# EAGLE board pxbee-proto (EAGLE 9.4.2)
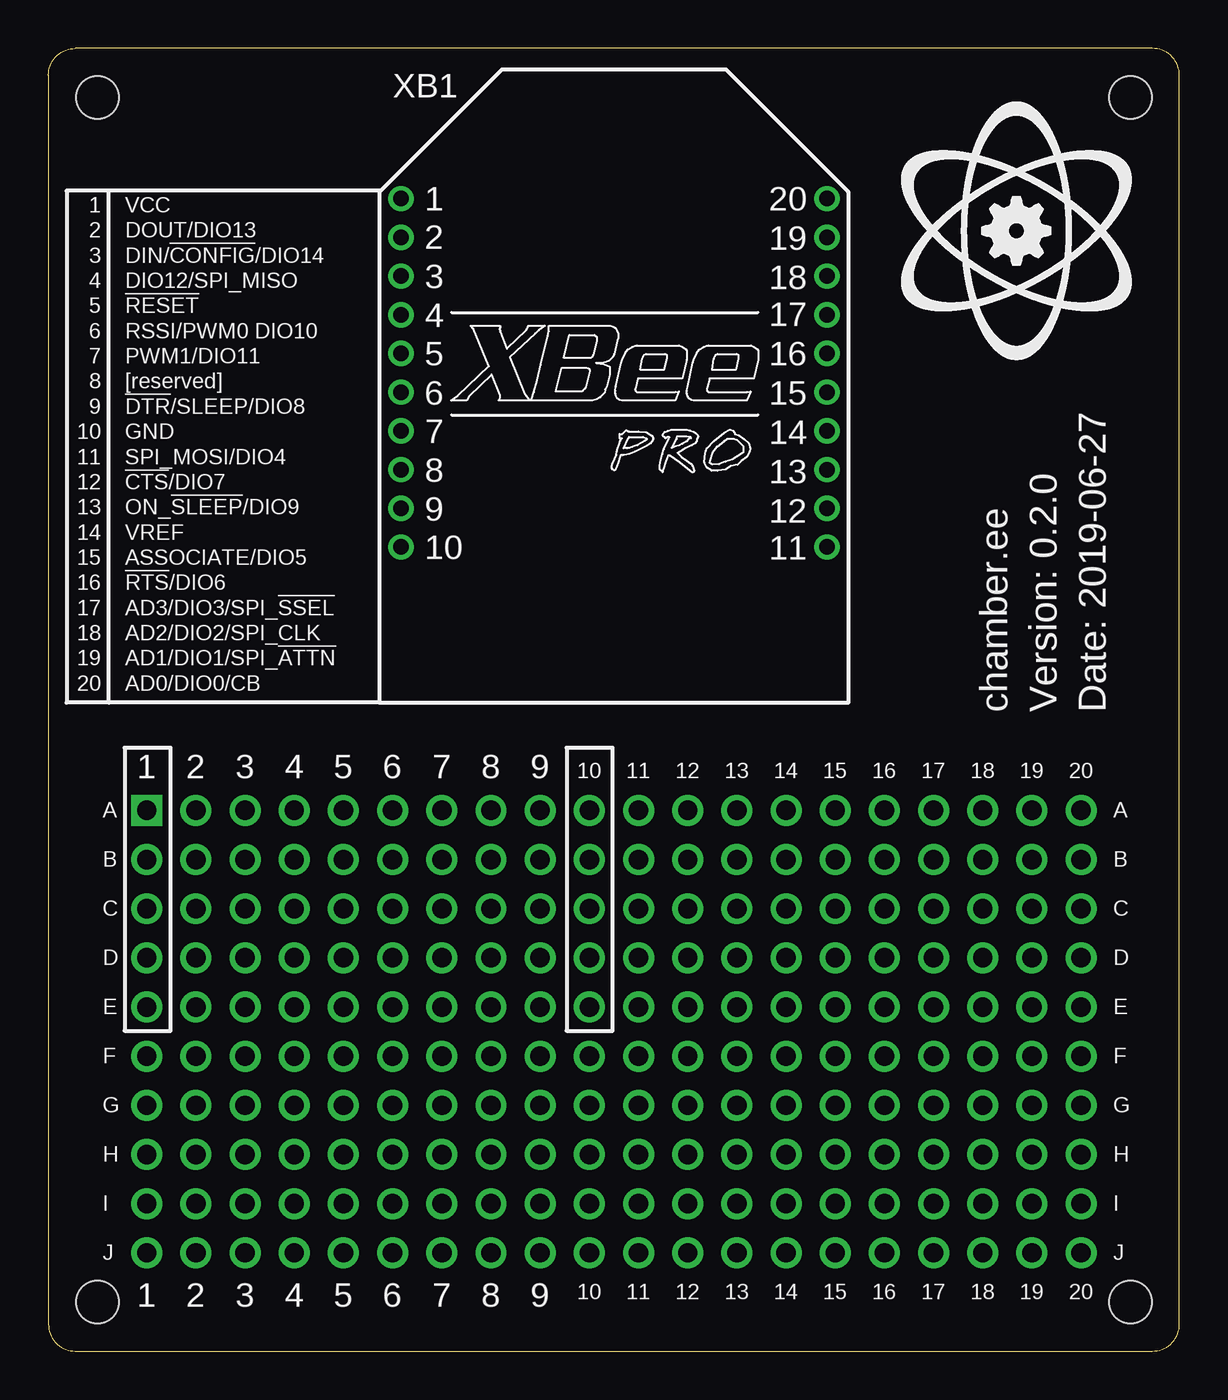
[diagram p0: board, top side]
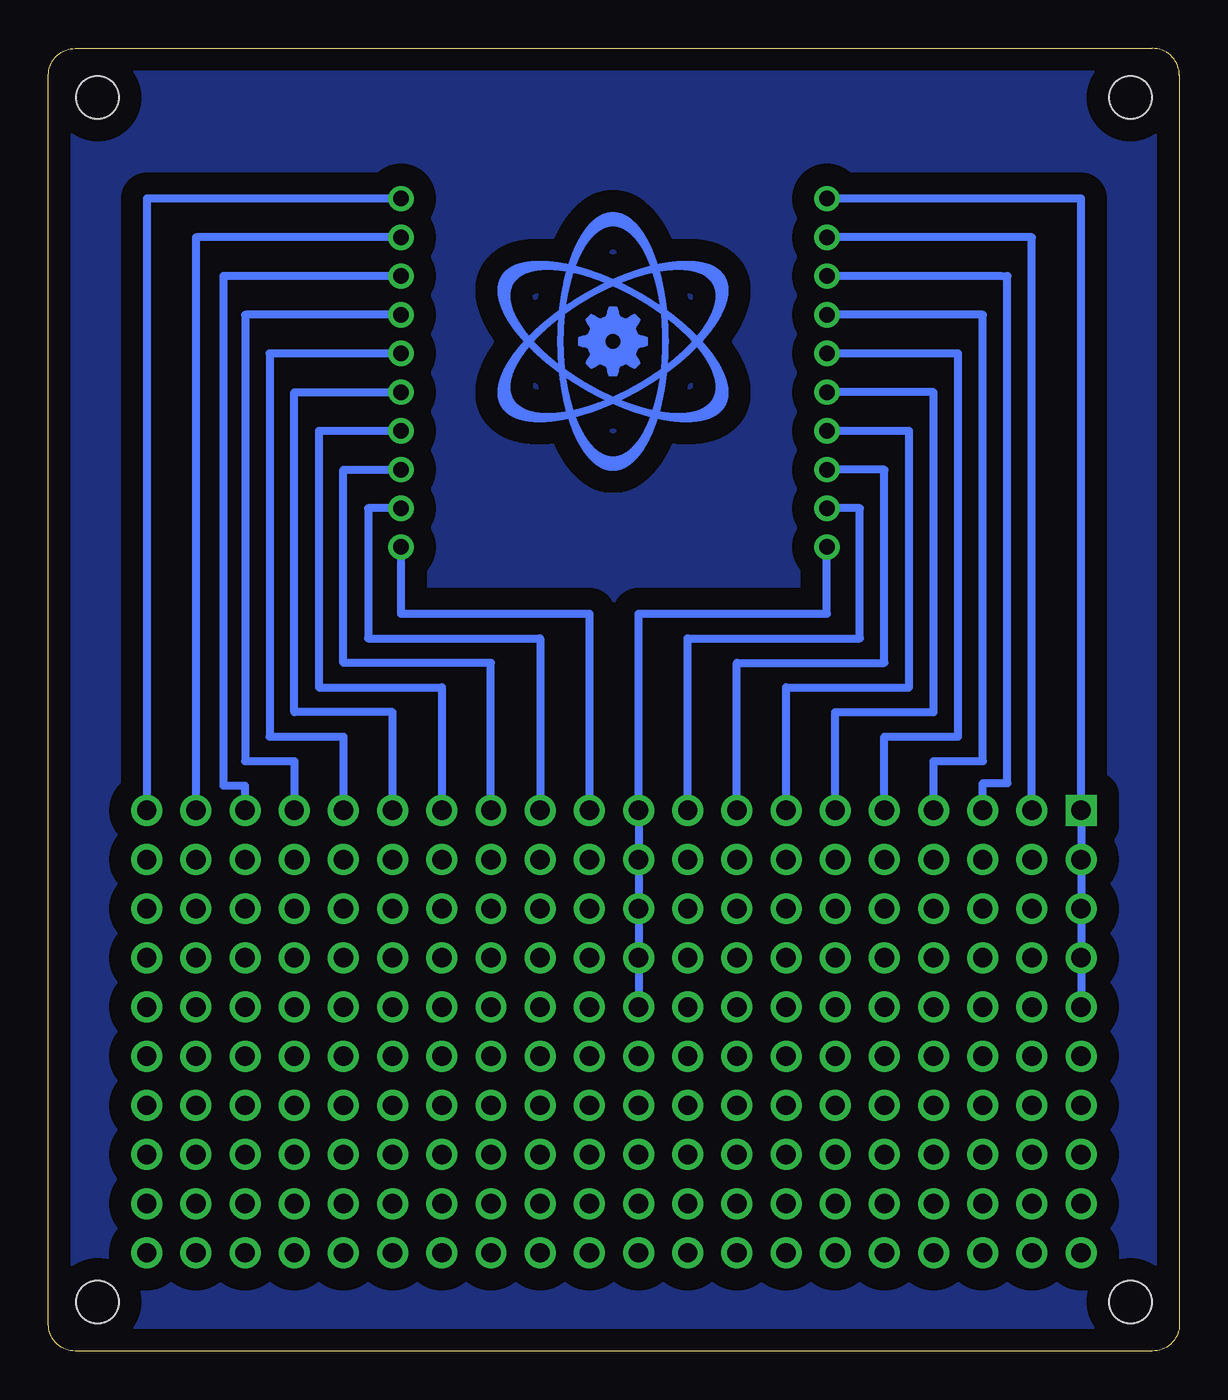
[diagram p1: board, bottom side, seen from below]

Size 58.42 x 67.31 mm. Coordinates in mm from the lower left corner, seen from the top.
Outline: 58.42,1.4 58.42,65.91 arc90 57.02,67.31 1.4,67.31 arc90 0,65.91 0,1.4 arc90 1.4,0 57.02,0 arc90 58.42,1.4
Copper layers (1*16): Top 0.035mm / dielectric 1.5mm / Bottom 0.035mm
Design rules "default": minimum track width 6mil, minimum drill 0.35mm, track to track 6mil, track to pad 6mil, pad to pad 6mil, via to via 6mil, smd to smd 6mil, copper to edge 40mil, drill to drill 6mil, minimum pad ring 10mil, minimum via ring 8mil, stop-mask expansion 4mil, vias tented up to drill 0mil, thermal gap 10mil
Net classes: 0 default: width 0.406 mm, clearance 0.406 mm
Holes 2.2 mm at 2.54,2.54 55.88,2.54 55.88,64.77 2.54,64.77

## Footprints (pad centres in the part's own frame; a part is rotated, then mirrored left to right if it is on the bottom)
XBEE_PROTO_TH_20X10 = drill 1 pad 1.6 square: P1 -24.13,0 | drill 1 pad 1.6: P1-B -24.13,-2.54; P1-C -24.13,-5.08; P1-D -24.13,-7.62; P1-E -24.13,-10.16; P1-F -24.13,-12.7; P1-G -24.13,-15.24; P1-H -24.13,-17.78; P1-I -24.13,-20.32; P1-J -24.13,-22.86; P2 -21.59,0; P2-B -21.59,-2.54; P2-C -21.59,-5.08; P2-D -21.59,-7.62; P2-E -21.59,-10.16; P2-F -21.59,-12.7; P2-G -21.59,-15.24; P2-H -21.59,-17.78; P2-I -21.59,-20.32; P2-J -21.59,-22.86; P3 -19.05,0; P3-B -19.05,-2.54; P3-C -19.05,-5.08; P3-D -19.05,-7.62; P3-E -19.05,-10.16; P3-F -19.05,-12.7; P3-G -19.05,-15.24; P3-H -19.05,-17.78; P3-I -19.05,-20.32; P3-J -19.05,-22.86; P4 -16.51,0; P4-B -16.51,-2.54; P4-C -16.51,-5.08; P4-D -16.51,-7.62; P4-E -16.51,-10.16; P4-F -16.51,-12.7; P4-G -16.51,-15.24; P4-H -16.51,-17.78; P4-I -16.51,-20.32; P4-J -16.51,-22.86; P5 -13.97,0; P5-B -13.97,-2.54; P5-C -13.97,-5.08; P5-D -13.97,-7.62; P5-E -13.97,-10.16; P5-F -13.97,-12.7; P5-G -13.97,-15.24; P5-H -13.97,-17.78; P5-I -13.97,-20.32; P5-J -13.97,-22.86; P6 -11.43,0; P6-B -11.43,-2.54; P6-C -11.43,-5.08; P6-D -11.43,-7.62; P6-E -11.43,-10.16; P6-F -11.43,-12.7; P6-G -11.43,-15.24; P6-H -11.43,-17.78; P6-I -11.43,-20.32; P6-J -11.43,-22.86; P7 -8.89,0; P7-B -8.89,-2.54; P7-C -8.89,-5.08; P7-D -8.89,-7.62; P7-E -8.89,-10.16; P7-F -8.89,-12.7; P7-G -8.89,-15.24; P7-H -8.89,-17.78; P7-I -8.89,-20.32; P7-J -8.89,-22.86; P8 -6.35,0; P8-B -6.35,-2.54; P8-C -6.35,-5.08; P8-D -6.35,-7.62; P8-E -6.35,-10.16; P8-F -6.35,-12.7; P8-G -6.35,-15.24; P8-H -6.35,-17.78; P8-I -6.35,-20.32; P8-J -6.35,-22.86; P9 -3.81,0; P9-B -3.81,-2.54; P9-C -3.81,-5.08; P9-D -3.81,-7.62; P9-E -3.81,-10.16; P9-F -3.81,-12.7; P9-G -3.81,-15.24; P9-H -3.81,-17.78; P9-I -3.81,-20.32; P9-J -3.81,-22.86; P10 -1.27,0; P10-B -1.27,-2.54; P10-C -1.27,-5.08; P10-D -1.27,-7.62; P10-E -1.27,-10.16; P10-F -1.27,-12.7; P10-G -1.27,-15.24; P10-H -1.27,-17.78; P10-I -1.27,-20.32; P10-J -1.27,-22.86; P11 1.27,0; P11-B 1.27,-2.54; P11-C 1.27,-5.08; P11-D 1.27,-7.62; P11-E 1.27,-10.16; P11-F 1.27,-12.7; P11-G 1.27,-15.24; P11-H 1.27,-17.78; P11-I 1.27,-20.32; P11-J 1.27,-22.86; P12 3.81,0; P12-B 3.81,-2.54; P12-C 3.81,-5.08; P12-D 3.81,-7.62; P12-E 3.81,-10.16; P12-F 3.81,-12.7; P12-G 3.81,-15.24; P12-H 3.81,-17.78; P12-I 3.81,-20.32; P12-J 3.81,-22.86; P13 6.35,0; P13-B 6.35,-2.54; P13-C 6.35,-5.08; P13-D 6.35,-7.62; P13-E 6.35,-10.16; P13-F 6.35,-12.7; P13-G 6.35,-15.24; P13-H 6.35,-17.78; P13-I 6.35,-20.32; P13-J 6.35,-22.86; P14 8.89,0; P14-B 8.89,-2.54; P14-C 8.89,-5.08; P14-D 8.89,-7.62; P14-E 8.89,-10.16; P14-F 8.89,-12.7; P14-G 8.89,-15.24; P14-H 8.89,-17.78; P14-I 8.89,-20.32; P14-J 8.89,-22.86; P15 11.43,0; P15-B 11.43,-2.54; P15-C 11.43,-5.08; P15-D 11.43,-7.62; P15-E 11.43,-10.16; P15-F 11.43,-12.7; P15-G 11.43,-15.24; P15-H 11.43,-17.78; P15-I 11.43,-20.32; P15-J 11.43,-22.86; P16 13.97,0; P16-B 13.97,-2.54; P16-C 13.97,-5.08; P16-D 13.97,-7.62; P16-E 13.97,-10.16; P16-F 13.97,-12.7; P16-G 13.97,-15.24; P16-H 13.97,-17.78; P16-I 13.97,-20.32; P16-J 13.97,-22.86; P17 16.51,0; P17-B 16.51,-2.54; P17-C 16.51,-5.08; P17-D 16.51,-7.62; P17-E 16.51,-10.16; P17-F 16.51,-12.7; P17-G 16.51,-15.24; P17-H 16.51,-17.78; P17-I 16.51,-20.32; P17-J 16.51,-22.86; P18 19.05,0; P18-B 19.05,-2.54; P18-C 19.05,-5.08; P18-D 19.05,-7.62; P18-E 19.05,-10.16; P18-F 19.05,-12.7; P18-G 19.05,-15.24; P18-H 19.05,-17.78; P18-I 19.05,-20.32; P18-J 19.05,-22.86; P19 21.59,0; P19-B 21.59,-2.54; P19-C 21.59,-5.08; P19-D 21.59,-7.62; P19-E 21.59,-10.16; P19-F 21.59,-12.7; P19-G 21.59,-15.24; P19-H 21.59,-17.78; P19-I 21.59,-20.32; P19-J 21.59,-22.86; P20 24.13,0; P20-B 24.13,-2.54; P20-C 24.13,-5.08; P20-D 24.13,-7.62; P20-E 24.13,-10.16; P20-F 24.13,-12.7; P20-G 24.13,-15.24; P20-H 24.13,-17.78; P20-I 24.13,-20.32; P20-J 24.13,-22.86
XBEE-PRO = drill 0.8 pad 1.27: 1 -11,8.746; 2 -11,6.746; 3 -11,4.746; 4 -11,2.746; 5 -11,0.746; 6 -11,-1.254; 7 -11,-3.254; 8 -11,-5.254; 9 -11,-7.254; 10 -11,-9.254; 11 11,-9.254; 12 11,-7.254; 13 11,-5.254; 14 11,-3.254; 15 11,-1.254; 16 11,0.746; 17 11,2.746; 18 11,4.746; 19 11,6.746; 20 11,8.746

## Placement (x,y rotation side)
U$2  XBEE_PROTO  [XBEE_PROTO_TH_20X10]  29.21,27.94 0 top
XB1  XBEE-PRO  [XBEE-PRO]  29.21,50.8 0 top

## Library data of the parts
U$2 = pxbee_proto
XB1 = xbee; MPN: XBP24-AWI-001; OC_FARNELL: 1337916; OC_NEWARK: 42M2667

## Nets
N$1: U$2.P1 U$2.P1-B U$2.P1-C U$2.P1-D U$2.P1-E XB1.1
N$2: U$2.P2 XB1.2
N$3: U$2.P3 XB1.3
N$4: U$2.P4 XB1.4
N$5: U$2.P5 XB1.5
N$6: U$2.P6 XB1.6
N$7: U$2.P7 XB1.7
N$8: U$2.P8 XB1.8
N$9: U$2.P9 XB1.9
N$10: U$2.P10 U$2.P10-B U$2.P10-C U$2.P10-D U$2.P10-E XB1.10
N$11: U$2.P11 XB1.11
N$12: U$2.P12 XB1.12
N$13: U$2.P13 XB1.13
N$14: U$2.P14 XB1.14
N$15: U$2.P15 XB1.15
N$16: U$2.P16 XB1.16
N$17: U$2.P17 XB1.17
N$18: U$2.P18 XB1.18
N$19: U$2.P19 XB1.19
N$20: U$2.P20 XB1.20

## Tracks (layer width: path | path; a pad name or v marks a point on that pad's centre or on a via)
BORDER
  pour Bottom (isolate 1.143): 0.01,1.39 0.01,65.92 arc-90 1.39,67.31 57.03,67.31 arc-90 58.42,65.91 58.42,1.4 arc-90 57.03,0.01 1.39,0.01 arc-90
N$1
  Bottom 0.406: XB1.1 5.12,59.55 5.08,59.55 U$2.P1 U$2.P1-B U$2.P1-C U$2.P1-D U$2.P1-E
N$2
  Bottom 0.406: U$2.P2 7.62,57.55 7.63,57.55 XB1.2
N$3
  Bottom 0.406: U$2.P3 10.16,29.35 8.89,29.35 8.89,55.56 9.24,55.55 XB1.3
N$4
  Bottom 0.406: U$2.P4 12.7,30.48 10.16,30.48 10.16,53.55 XB1.4
N$5
  Bottom 0.406: U$2.P5 15.24,31.75 11.43,31.75 11.43,51.55 11.45,51.55 XB1.5
N$6
  Bottom 0.406: U$2.P6 17.78,33.02 12.7,33.02 12.7,49.55 XB1.6
N$7
  Bottom 0.406: U$2.P7 20.32,34.29 13.97,34.29 13.97,47.55 XB1.7
N$8
  Bottom 0.406: U$2.P8 22.86,35.56 15.24,35.56 15.24,45.55 15.25,45.55 XB1.8
N$9
  Bottom 0.406: U$2.P9 25.4,36.83 16.51,36.83 16.51,43.55 XB1.9
N$10
  Bottom 0.406: XB1.10 18.21,38.1 27.94,38.1 U$2.P10 U$2.P10-B U$2.P10-C U$2.P10-D U$2.P10-E
N$11
  Bottom 0.406: XB1.11 40.21,38.1 30.48,38.1 U$2.P11
N$12
  Bottom 0.406: XB1.12 41.9,43.55 41.91,43.55 41.91,36.83 33.02,36.83 U$2.P12
N$13
  Bottom 0.406: U$2.P13 35.56,35.56 43.18,35.56 43.18,45.55 XB1.13
N$14
  Bottom 0.406: XB1.14 44.41,47.55 44.45,47.55 44.45,34.29 38.1,34.29 U$2.P14
N$15
  Bottom 0.406: U$2.P15 40.64,33.02 45.72,33.02 45.72,49.55 45.69,49.55 XB1.15
N$16
  Bottom 0.406: XB1.16 46.99,51.55 46.99,31.75 43.18,31.75 U$2.P16
N$17
  Bottom 0.406: XB1.17 48.23,53.55 48.26,53.55 48.26,30.48 45.72,30.48 U$2.P17
N$18
  Bottom 0.406: U$2.P18 48.26,29.21 49.39,29.21 49.39,55.55 49.37,55.55 XB1.18
N$19
  Bottom 0.406: XB1.19 50.76,57.55 50.8,57.55 U$2.P19
N$20
  Bottom 0.406: XB1.20 53.31,59.55 53.34,59.55 U$2.P20
(copper drawn outside any net)
  shapes: Bottom area x6591

## Text on the board
tPlace: 1 VCC / 2 DOUT/DIO13 / 3 DIN/!CONFIG!/DIO14 / 4 DIO12/SPI_MISO / 5 !RESET! / 6 RSSI/PWM0 DIO10 / 7 PWM1/DIO11 / 8 [reserved] / 9 !DTR!/SLEEP/DIO8 / 10 GND / 11 SPI_MOSI/DIO4 / 12 !CTS!/DIO7 / 13 ON_!SLEEP!/DIO9 / 14 VREF / 15 ASSOCIATE/DIO5 / 16 !RTS!/DIO6 / 17 AD3/DIO3/SPI_!SSEL! / 18 AD2/DIO2/SPI_CLK / 19 AD1/DIO1/SPI_!ATTN! / 20 AD0/DIO0/CB | chamber.ee | Version: 0.2.0 | Date: 2019-06-27